# Altium PCB PCB_Simple Signal Generator - 2.0_2021-10-03.pcbdoc
Units mm, origin at the board's own origin, x right, y up, seen from the top; angles counter-clockwise.
Board outline 107.88 x 124.73 mm, 2 copper layers (Top Layer, Bottom Layer); 28 components, 30 nets, 79 pads, 4 vias.
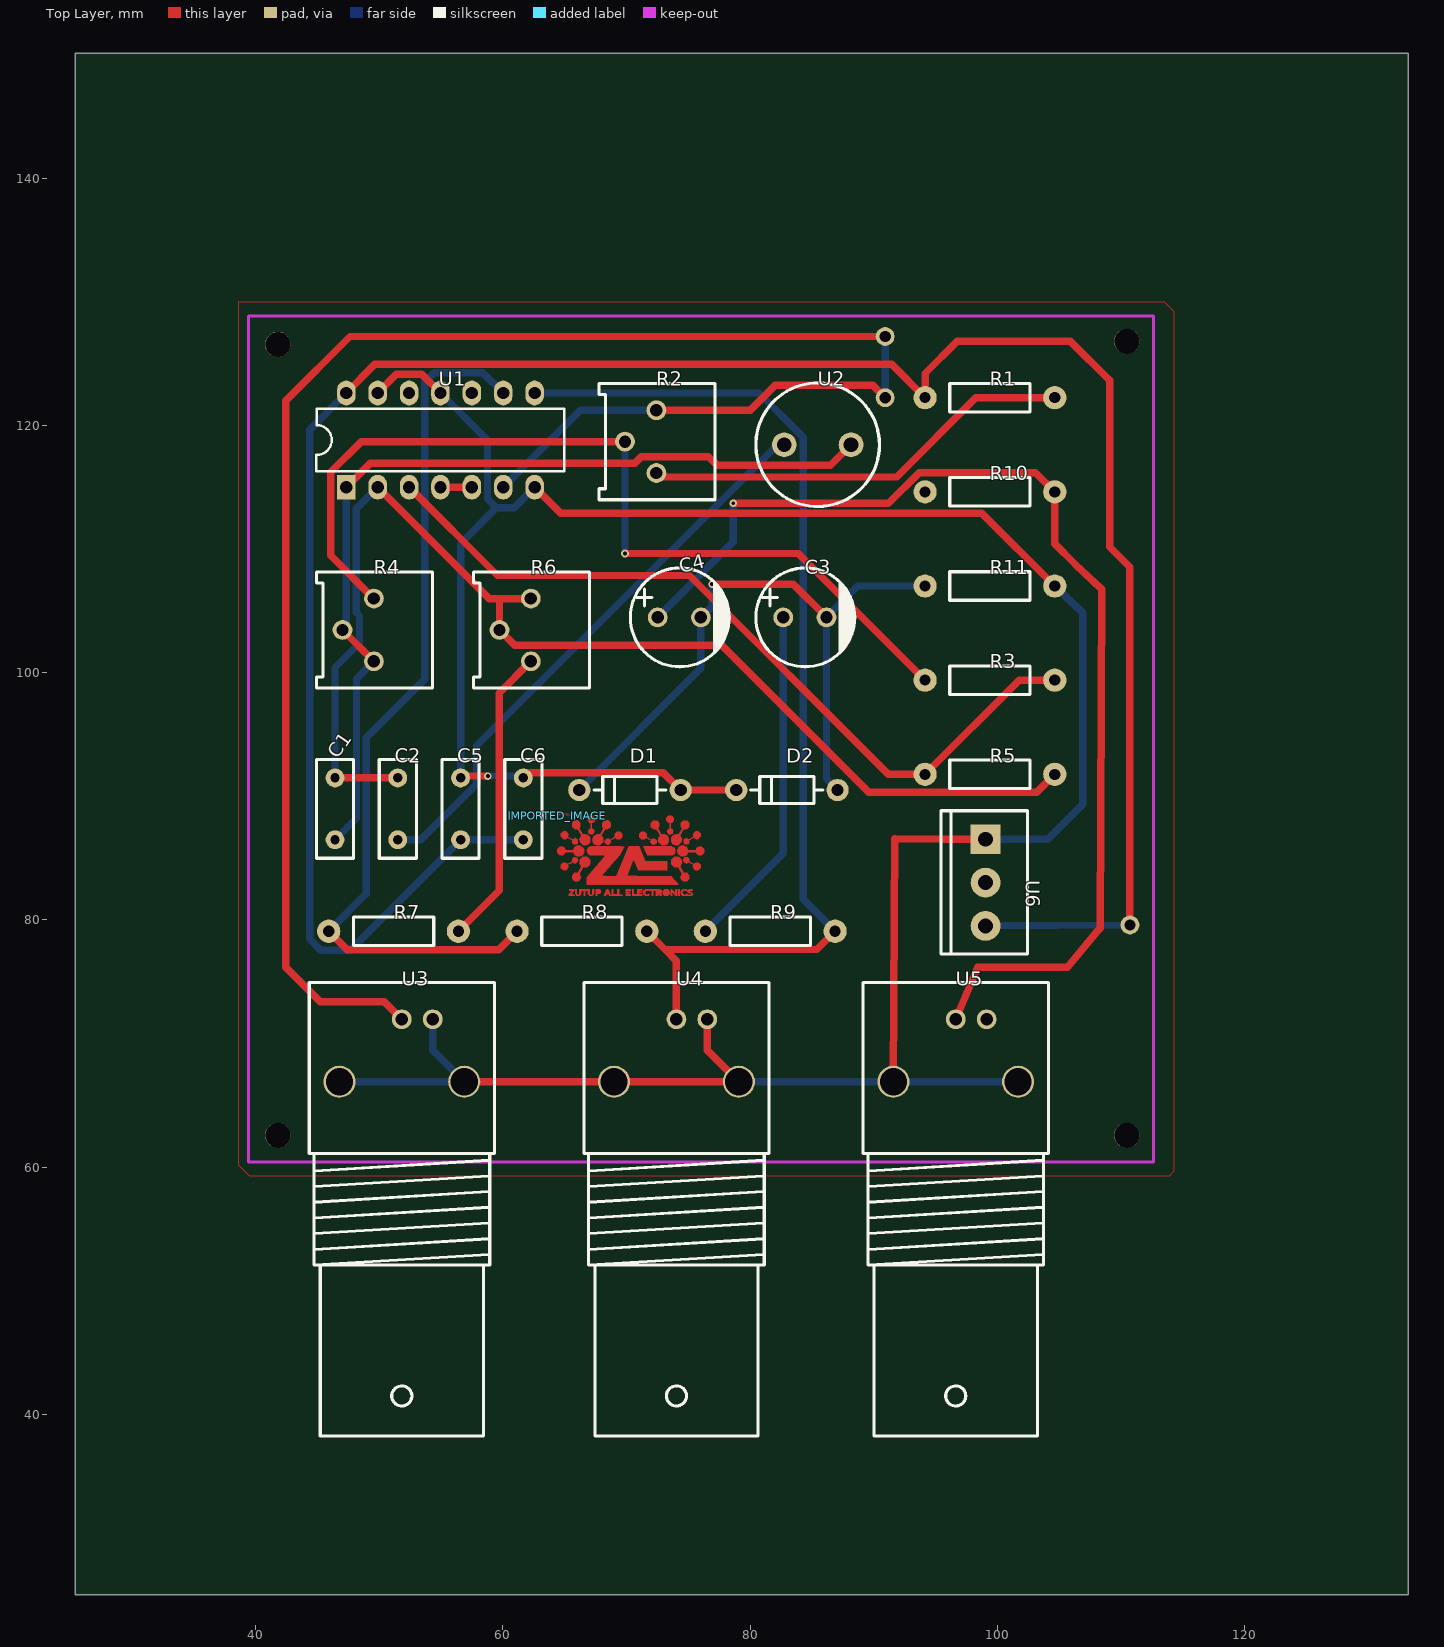
[diagram p0: Top Layer view]
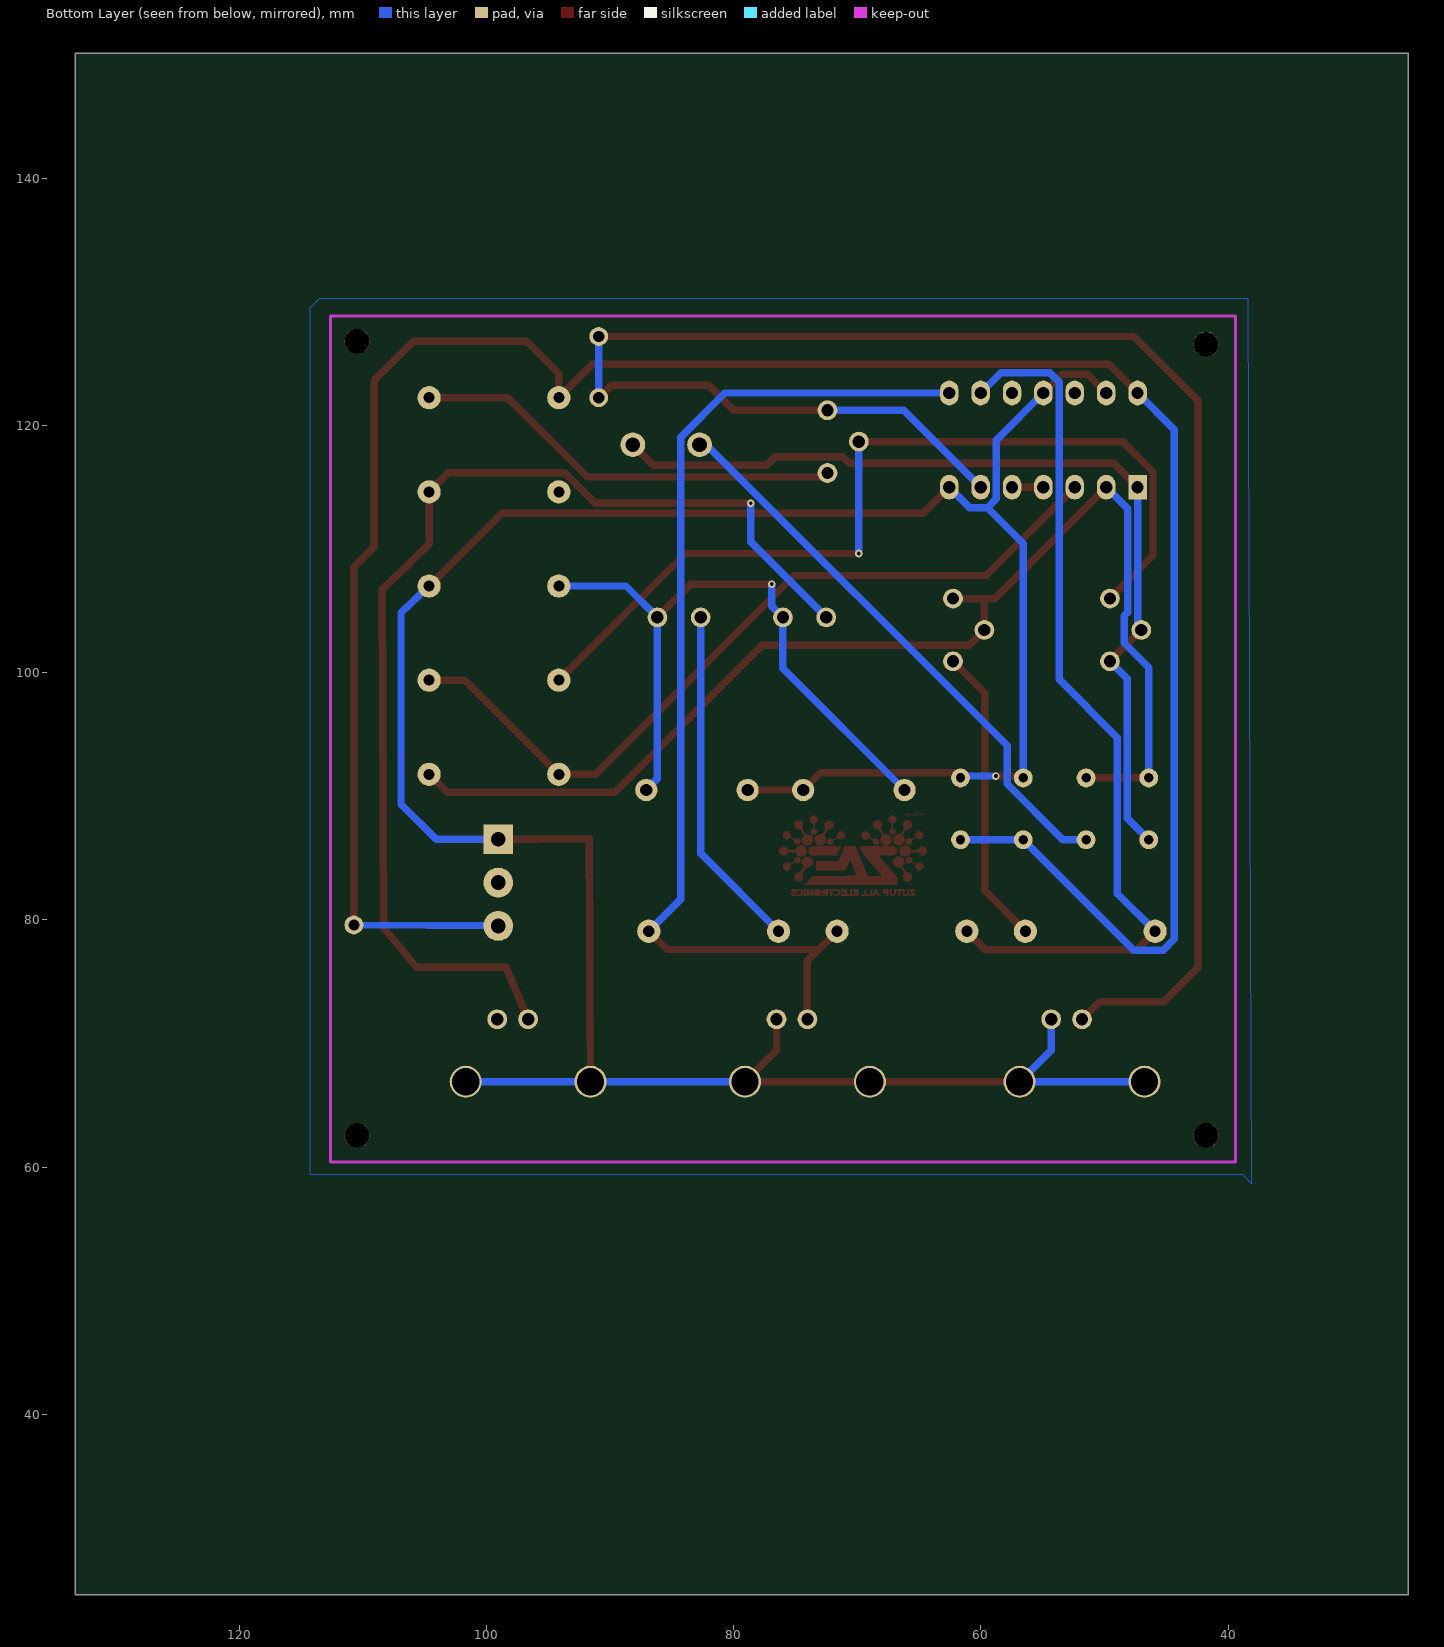
[diagram p1: Bottom Layer view, seen from below]

## Layer stack, top to bottom
Top Layer: signal copper (thickness not stored)
Dielectric: dielectric 0.32, FR-4, Dk 4.8
Bottom Layer: signal copper (thickness not stored)

## Board outline
133.284,25.4 25.4,25.4 25.4,150.129 133.284,150.129

## Components (designator, comment, footprint, x,y, rotation, side; value= is the part's Value field where it differs from the comment)
C1 "1.5nF POLIESTER" "FILM CAPACITOR" 46.412,88.991 r0 top
C2 "22nF POLIESTER" "FILM CAPACITOR" 51.492,88.991 r0 top
C3 "100uF 16V" CAP-TH_BD8.0-P3.50-D0.6-FD 84.433,104.485 r0 top
C4 "100uF 16V" CAP-TH_BD8.0-P3.50-D0.6-FD 74.273,104.485 r0 top
C5 "100nf" "FILM CAPACITOR" 56.572,88.991 r0 top
C6 "100nf 50v ceramico" "FILM CAPACITOR" 61.652,88.991 r0 top
D1 "1N4148" DO-35_BD2.0-L4.2-P8.20-D0.5-R-RD 70.282,90.515 r0 top
D2 "1N4148" DO-35_BD2.0-L4.2-P8.20-D0.5-R-RD 82.982,90.515 r0 top
IMPORTED_IMAGE "IMPORTED_IMAGE" IMPORTED_IMAGE 64.38,88.441 r0 top
R1 "1k" RES-TH_BD2.3-L6.5-P10.50-D0.5 99.412,122.265 r0 top
R2 "10k Duty adj 3386P-503" RES-ADJ-TH_3P-L9.5-W9.5-P2.54-BR-BS 71.149,118.709 r0 top
R3 "27k" RES-TH_BD2.3-L6.5-P10.50-D0.5 99.412,99.405 r0 top
R4 "100k Freq adj 3386P-503" RES-ADJ-TH_3P-L9.5-W9.5-P2.54-BR-BS 48.289,103.469 r0 top
R5 "10k" RES-TH_BD2.3-L6.5-P10.50-D0.5 99.412,91.785 r0 top
R6 "100k Dist adj 3386P-503" RES-ADJ-TH_3P-L9.5-W9.5-P2.54-BR-BS 60.989,103.469 r0 top
R7 "39k" RES-TH_BD2.3-L6.5-P10.50-D0.5 51.152,79.085 r0 top
R8 "100k" RES-TH_BD2.3-L6.5-P10.50-D0.5 66.392,79.085 r0 top
R9 "10k" RES-TH_BD2.3-L6.5-P10.50-D0.5 81.632,79.085 r0 top
R10 "10k" RES-TH_BD2.3-L6.5-P10.50-D0.5 99.412,114.645 r0 top
R11 "10k" RES-TH_BD2.3-L6.5-P10.50-D0.5 99.412,107.025 r0 top
U1 "HEF4069UB" DIP-14_L20.0-W7.6-P2.54-LS7.6-BL 54.944,118.836 r0 top
U2 "Chave" CHAVE 85.471,118.455 r0 top
U3 "ANT-TH_KH-BNC75-3511" ANT-TH_KH-BNC75-3511 51.816,69.433 r0 top
U4 "ANT-TH_KH-BNC75-3511" ANT-TH_KH-BNC75-3511 74.041,69.433 r0 top
U5 "ANT-TH_KH-BNC75-3511" ANT-TH_KH-BNC75-3511 96.647,69.433 r0 top
U6 "SCREWTERMINAL-3.5MM-3" SCREWTERMINAL-3.5MM-3 99.06,83.022 r270 top
? "" ? 116.528,94.643 r0 top
? "" ? 76.136,133.06 r0 top

## Footprints (in the part's own frame and the unit in brackets; to place one, negate y for a bottom-side part, rotate by r counter-clockwise, add the part's x,y. Pads: shape width x height; smd on the part's side, far side on the other; paste and mask are expansions set on the pad)
ANT-TH_KH-BNC75-3511 [mm]
  round 1.6 hole 1: 1(0,2.525) 2(2.5,2.525)
  round 2.601 hole 2.2: 3(5.05,-2.525) 4(-5.05,-2.525)
  silkscreen extent -7.49,-31.21 7.49,5.5
CAP-TH_BD8.0-P3.50-D0.6-FD [mm]
  round 1.6 hole 1: 1(-1.75,0) 2(1.75,0)
  silkscreen extent -3.96,-4 4.04,4
CHAVE [mm]
  round 2 hole 1.2: 1(-2.7,0) 2(2.7,0)
  silkscreen extent -5,-5 5,5
DIP-14_L20.0-W7.6-P2.54-LS7.6-BL [mm]
  rect 1.5x2 hole 1: 1(-7.62,-3.81)
  oval 1.5x2 hole 1: 2(-5.08,-3.81) 3(-2.54,-3.81) 4(0,-3.81) 5(2.54,-3.81) 6(5.08,-3.81) 7(7.62,-3.81) 8(7.62,3.81) 9(5.08,3.81) 10(2.54,3.81) 11(0,3.81) 12(-2.54,3.81) 13(-5.08,3.81) 14(-7.62,3.81)
  silkscreen extent -10.03,-2.53 10,2.54
DO-35_BD2.0-L4.2-P8.20-D0.5-R-RD [mm]
  round 1.8 hole 1: 1(4.1,0) 2(-4.1,0)
  silkscreen extent -2.92,-1.1 2.92,1.1
"FILM CAPACITOR" [mil]
  round 60 hole 30: 1(0,-98.43) 2(0,98.42)
  silkscreen extent -59,-157 59,157
IMPORTED_IMAGE [mm]
  Top Layer region: 1.422,-6.436 1.44,-6.489 0.927,-6.489 0.927,-6.448 0.928,-6.444 0.93,-6.437 0.933,-6.43 0.937,-6.421 0.942,-6.412 0.949,-6.401 0.956,-6.39 0.964,-6.377 0.973,-6.365 0.983,-6.351 0.993,-6.337 1.004,-6.323 1.016,-6.308 1.028,-6.294 1.041,-6.279 1.053,-6.264 1.08,-6.233 1.104,-6.205 1.124,-6.181 1.14,-6.159 1.154,-6.141 1.163,-6.125 1.169,-6.111 1.172,-6.1 1.172,-6.091 1.168,-6.084 1.16,-6.078 1.15,-6.074 1.136,-6.071 1.119,-6.069 1.098,-6.068 1.075,-6.068 0.969,-6.068 0.969,-5.941 1.391,-5.941 1.391,-6.001 1.39,-6.008 1.388,-6.016 1.386,-6.025 1.382,-6.034 1.378,-6.045 1.372,-6.056 1.366,-6.068 1.36,-6.08 1.352,-6.093 1.344,-6.106 1.335,-6.12 1.326,-6.133 1.316,-6.147 1.306,-6.16 1.296,-6.173 1.285,-6.186 1.262,-6.214 1.242,-6.239 1.225,-6.26 1.211,-6.279 1.201,-6.295 1.193,-6.309 1.189,-6.321 1.188,-6.331 1.19,-6.339 1.195,-6.346 1.203,-6.352 1.214,-6.357 1.229,-6.361 1.247,-6.364 1.268,-6.367 1.292,-6.37 1.405,-6.384
  Top Layer region: 3.118,-6.489 3.118,-5.941 3.241,-5.941 3.271,-5.942 3.3,-5.943 3.326,-5.945 3.351,-5.949 3.374,-5.953 3.396,-5.958 3.416,-5.964 3.435,-5.972 3.452,-5.98 3.469,-5.99 3.483,-6 3.497,-6.012 3.51,-6.025 3.522,-6.04 3.532,-6.056 3.542,-6.073 3.585,-6.152 3.498,-6.314 3.245,-6.369 3.245,-6.489 hole: 676183.442,822770.721 676183.442,821897.215 676183.442,821897.215 677648.514,822179.155 677648.514,822179.155 677789.484,822911.691 677789.484,822911.691 677930.708,823644.227 677930.708,823644.227 676183.442,823644.227 676183.442,823644.227 676183.442,822770.721
  Top Layer region: 1.562,-6.489 1.475,-6.326 1.475,-5.941 1.601,-5.941 1.601,-6.31 1.663,-6.361 1.724,-6.412 1.812,-6.358 1.812,-5.941 2.444,-5.941 2.444,-6.068 2.275,-6.068 2.275,-6.489 2.149,-6.489 2.149,-6.068 1.992,-6.068 1.967,-6.219 1.961,-6.251 1.954,-6.282 1.945,-6.314 1.935,-6.343 1.925,-6.371 1.914,-6.395 1.903,-6.415 1.893,-6.43 1.844,-6.489
  Top Layer region: 9.036,-6.423 8.969,-6.489 8.686,-6.489 8.62,-6.423 8.554,-6.357 8.554,-6.095 8.624,-6.018 8.693,-5.941 8.962,-5.941 9.028,-6.015 9.038,-6.027 9.047,-6.038 9.056,-6.05 9.064,-6.063 9.071,-6.076 9.078,-6.089 9.084,-6.102 9.089,-6.115 9.094,-6.128 9.099,-6.142 9.102,-6.156 9.105,-6.17 9.108,-6.184 9.109,-6.197 9.111,-6.211 9.111,-6.225 9.111,-6.239 9.11,-6.253 9.109,-6.267 9.107,-6.28 9.105,-6.293 9.101,-6.307 9.098,-6.32 9.093,-6.332 9.088,-6.345 9.083,-6.357 9.076,-6.369 9.069,-6.381 9.062,-6.392 9.054,-6.403 9.045,-6.413 hole: 731169.108,820856.069 731921.71,820305.905 731921.71,820305.905 732731.462,820739.483 732731.462,820739.483 733541.214,821172.807 733541.214,821172.807 733280.102,823433.661 733280.102,823433.661 732135.832,823565.487 732135.832,823565.487 730991.816,823697.567 730991.816,823697.567 730704.288,822551.773 730704.288,822551.773 730416.76,821406.487 730416.76,821406.487 731169.108,820856.069
  Top Layer region: 5.984,-6.426 5.984,-6.489 5.562,-6.489 5.562,-5.941 5.984,-5.941 5.984,-6.068 5.689,-6.068 5.689,-6.152 5.941,-6.152 5.941,-6.278 5.689,-6.278 5.689,-6.363 5.984,-6.363
  Top Layer region: 7.272,-6.488 7.149,-6.489 6.995,-6.35 6.995,-6.073 7.089,-6.007 7.182,-5.941 7.399,-5.941 7.45,-5.992 7.501,-6.042 7.501,-5.941 7.964,-5.941 7.964,-6.068 7.795,-6.068 7.795,-6.489 7.669,-6.489 7.669,-6.076 7.169,-6.076 7.119,-6.206 7.143,-6.28 7.167,-6.355 7.301,-6.406 7.398,-6.325 7.522,-6.405 7.458,-6.446 7.451,-6.451 7.443,-6.455 7.434,-6.459 7.424,-6.462 7.413,-6.466 7.402,-6.47 7.39,-6.473 7.378,-6.476 7.365,-6.479 7.352,-6.481 7.338,-6.483 7.325,-6.485 7.311,-6.486 7.298,-6.487 7.285,-6.488
  Top Layer region: 2.617,-6.489 2.552,-6.395 2.486,-6.302 2.486,-5.941 2.655,-5.941 2.655,-6.358 2.743,-6.412 2.865,-6.31 2.865,-5.941 2.992,-5.941 2.992,-6.326 2.948,-6.408 2.905,-6.489
  Top Layer region: 6.911,-6.426 6.911,-6.489 6.489,-6.489 6.489,-5.941 6.911,-5.941 6.911,-6.068 6.658,-6.068 6.658,-6.152 6.918,-6.152 6.883,-6.257 6.658,-6.284 6.658,-6.363 6.911,-6.363
  Top Layer region: 9.571,-6.489 9.442,-6.332 9.312,-6.175 9.312,-6.489 9.186,-6.489 9.186,-5.941 9.291,-5.941 9.562,-6.257 9.564,-6.099 9.565,-5.941 9.692,-5.941 9.692,-6.489
  Top Layer region: 6.447,-6.426 6.447,-6.489 6.068,-6.489 6.068,-5.941 6.194,-5.941 6.194,-6.363 6.447,-6.363
  Top Layer region: 9.945,-6.215 9.945,-6.489 9.776,-6.489 9.776,-5.941 9.945,-5.941
  Top Layer region: 4.375,-6.456 4.389,-6.489 4.214,-6.489 4.214,-6.363 3.97,-6.363 3.921,-6.489 3.783,-6.489 3.808,-6.43 3.833,-6.369 3.883,-6.253 3.921,-6.163 4.014,-5.941 4.156,-5.941 4.28,-6.232 4.35,-6.397 hole: 684189.522,822169.503 684189.522,821537.551 684189.522,821537.551 685032.294,821537.551 685032.294,821537.551 685032.294,822801.455 685032.294,822801.455 684189.522,822801.455 684189.522,822801.455 684189.522,822169.503
  Top Layer region: 8.175,-6.426 8.175,-6.489 8.006,-6.489 8.006,-5.941 8.307,-5.941 8.47,-6.029 8.47,-6.273 8.378,-6.33 8.424,-6.376 8.442,-6.396 8.456,-6.418 8.466,-6.439 8.47,-6.455 8.468,-6.465 8.465,-6.473 8.459,-6.48 8.451,-6.484 8.442,-6.487 8.431,-6.489 8.419,-6.489 8.406,-6.487 8.393,-6.484 8.379,-6.48 8.365,-6.474 8.351,-6.467 8.337,-6.458 8.324,-6.449 8.312,-6.438 8.301,-6.426 8.278,-6.401 8.253,-6.381 8.23,-6.368 8.212,-6.363 8.175,-6.363 hole: 725484.588,822801.455 725484.588,821897.215 725484.588,821897.215 726959.312,822181.187 726959.312,822181.187 726959.312,823422.231 726959.312,823422.231 725484.588,823706.203 725484.588,823706.203 725484.588,822801.455
  Top Layer region: 4.424,-6.489 4.424,-5.941 4.551,-5.941 4.551,-6.363 4.846,-6.363 4.846,-6.489
  Top Layer region: 4.888,-6.489 4.888,-5.941 5.014,-5.941 5.014,-6.357 5.282,-6.384 5.316,-6.489
  Top Layer region: 10.909,-6.482 10.531,-6.481 10.152,-6.48 10.029,-6.357 10.029,-6.095 10.099,-6.018 10.168,-5.941 10.44,-5.941 10.487,-5.998 10.534,-6.054 10.482,-6.106 10.357,-6.081 10.231,-6.055 10.194,-6.114 10.186,-6.128 10.179,-6.143 10.173,-6.159 10.167,-6.177 10.163,-6.195 10.159,-6.213 10.157,-6.23 10.156,-6.245 10.155,-6.318 10.329,-6.411 10.437,-6.321 10.466,-6.35 10.47,-6.353 10.475,-6.356 10.482,-6.36 10.491,-6.362 10.5,-6.365 10.511,-6.368 10.523,-6.371 10.536,-6.374 10.55,-6.376 10.564,-6.378 10.579,-6.381 10.595,-6.383 10.611,-6.384 10.628,-6.386 10.645,-6.387 10.662,-6.388 10.829,-6.397 10.872,-6.327 10.584,-6.232 10.561,-6.171 10.537,-6.11 10.561,-6.046 10.586,-5.983 10.683,-5.958 10.704,-5.954 10.727,-5.95 10.75,-5.947 10.774,-5.945 10.796,-5.944 10.818,-5.945 10.837,-5.946 10.854,-5.948 10.928,-5.962 10.945,-6.015 10.963,-6.068 10.703,-6.068 10.703,-6.101 10.704,-6.104 10.706,-6.108 10.709,-6.113 10.713,-6.117 10.718,-6.122 10.725,-6.127 10.732,-6.132 10.74,-6.138 10.749,-6.143 10.759,-6.149 10.769,-6.155 10.78,-6.16 10.792,-6.166 10.804,-6.171 10.816,-6.176 10.829,-6.181 10.956,-6.229 11.007,-6.364
  Top Layer region: 183 vertices and 0 holes, not listed, extent 2.398,-5.604 9.818,-2.486
  Top Layer region: 1.72,-5.292 1.597,-5.356 1.504,-5.328 1.494,-5.324 1.484,-5.32 1.473,-5.315 1.461,-5.31 1.449,-5.304 1.436,-5.297 1.424,-5.29 1.411,-5.282 1.398,-5.274 1.386,-5.266 1.373,-5.257 1.361,-5.249 1.349,-5.24 1.338,-5.231 1.327,-5.222 1.317,-5.213 1.222,-5.126 1.222,-4.857 1.309,-4.746 1.397,-4.635 1.681,-4.635 1.971,-4.119 1.887,-3.976 1.803,-3.833 1.829,-3.691 1.856,-3.549 1.966,-3.439 2.076,-3.329 2.45,-3.329 2.574,-3.452 2.697,-3.575 2.697,-3.917 2.455,-4.188 2.278,-4.192 2.1,-4.197 1.964,-4.452 1.828,-4.707 1.889,-4.837 1.951,-4.966 1.897,-5.098 1.842,-5.229
  Top Layer region: 10.323,-5.353 10.203,-5.291 10.083,-5.229 10.028,-5.098 9.974,-4.966 10.036,-4.835 10.098,-4.704 9.956,-4.447 9.813,-4.191 9.472,-4.191 9.35,-4.054 9.228,-3.917 9.228,-3.575 9.351,-3.452 9.475,-3.329 9.849,-3.329 9.957,-3.437 10.066,-3.546 10.093,-3.67 10.12,-3.795 10.039,-3.96 9.957,-4.125 10.244,-4.635 10.528,-4.635 10.616,-4.746 10.703,-4.857 10.703,-5.087 10.619,-5.193 10.536,-5.3
  Top Layer region: 0.517,-4.424 0.295,-4.25 0.295,-3.987 0.387,-3.89 0.478,-3.792 0.698,-3.792 0.784,-3.853 0.87,-3.913 1.046,-3.808 1.222,-3.703 1.222,-3.503 1.29,-3.435 1.359,-3.366 1.49,-3.379 1.622,-3.392 1.678,-3.51 1.734,-3.628 1.603,-3.828 1.52,-3.855 1.436,-3.881 1.256,-3.785 1.071,-3.883 0.886,-3.981 0.909,-4.053 0.931,-4.125 0.868,-4.249 0.804,-4.372 0.736,-4.398 0.72,-4.403 0.703,-4.408 0.685,-4.413 0.665,-4.417 0.646,-4.42 0.627,-4.422 0.609,-4.424 0.592,-4.424
  Top Layer region: 11.519,-4.337 11.408,-4.424 11.333,-4.424 11.316,-4.424 11.298,-4.422 11.279,-4.42 11.26,-4.417 11.24,-4.413 11.222,-4.408 11.205,-4.403 11.189,-4.398 11.121,-4.372 11.057,-4.249 10.994,-4.125 11.016,-4.053 11.039,-3.981 10.854,-3.883 10.669,-3.785 10.489,-3.881 10.405,-3.855 10.322,-3.828 10.258,-3.732 10.195,-3.636 10.224,-3.556 10.231,-3.539 10.238,-3.521 10.247,-3.502 10.256,-3.484 10.266,-3.467 10.275,-3.45 10.285,-3.436 10.293,-3.424 10.334,-3.371 10.571,-3.371 10.703,-3.503 10.703,-3.703 10.879,-3.808 11.055,-3.913 11.141,-3.853 11.227,-3.792 11.435,-3.792 11.533,-3.884 11.63,-3.976 11.63,-4.25
  Top Layer region: 1.596,-3.287 1.434,-3.2 1.304,-2.95 0.711,-2.95 0.498,-3.202 0.207,-3.202 0,-2.996 0,-2.704 0.268,-2.479 0.521,-2.529 0.598,-2.598 0.613,-2.614 0.627,-2.63 0.64,-2.647 0.652,-2.664 0.661,-2.681 0.668,-2.697 0.673,-2.712 0.674,-2.724 0.674,-2.781 1.304,-2.781 1.438,-2.522 1.588,-2.457 1.616,-2.445 1.629,-2.439 1.641,-2.434 1.652,-2.43 1.663,-2.426 1.673,-2.422 1.683,-2.419 1.692,-2.416 1.701,-2.414 1.71,-2.412 1.718,-2.41 1.727,-2.409 1.735,-2.408 1.743,-2.408 1.751,-2.408 1.759,-2.409 1.767,-2.41 1.776,-2.411 1.784,-2.413 1.793,-2.415 1.803,-2.418 1.812,-2.421 1.823,-2.424 1.833,-2.428 1.845,-2.433 1.857,-2.437 1.883,-2.448 1.913,-2.461 2.054,-2.519 2.191,-2.716 2.191,-2.954 2.128,-3.077 2.064,-3.2 1.902,-3.287
  Top Layer region: 9.991,-3.287 9.771,-3.097 9.747,-2.919 9.723,-2.741 9.795,-2.631 9.867,-2.521 10.016,-2.457 10.044,-2.445 10.057,-2.439 10.069,-2.434 10.08,-2.43 10.091,-2.426 10.101,-2.422 10.111,-2.419 10.12,-2.416 10.129,-2.414 10.138,-2.412 10.146,-2.41 10.154,-2.409 10.163,-2.408 10.171,-2.408 10.179,-2.408 10.187,-2.409 10.195,-2.41 10.204,-2.411 10.213,-2.413 10.222,-2.415 10.231,-2.418 10.241,-2.421 10.251,-2.425 10.262,-2.429 10.274,-2.433 10.286,-2.438 10.313,-2.449 10.343,-2.462 10.487,-2.522 10.554,-2.651 10.621,-2.781 11.251,-2.781 11.251,-2.724 11.252,-2.712 11.257,-2.697 11.264,-2.681 11.273,-2.664 11.285,-2.647 11.298,-2.63 11.312,-2.614 11.327,-2.598 11.404,-2.529 11.657,-2.479 11.925,-2.704 11.925,-2.996 11.718,-3.202 11.435,-3.202 11.343,-3.117 11.307,-3.08 11.278,-3.044 11.258,-3.013 11.251,-2.99 11.251,-2.95 10.621,-2.95 10.491,-3.2 10.329,-3.287
  Top Layer region: 9.474,-3.105 9.382,-3.202 7.292,-3.202 7.144,-2.88 7.114,-2.815 7.086,-2.753 7.061,-2.695 7.039,-2.642 7.02,-2.598 7.007,-2.562 6.998,-2.536 6.995,-2.522 6.995,-2.486 9.275,-2.486 9.394,-2.548 9.513,-2.609 9.539,-2.678 9.542,-2.685 9.544,-2.694 9.547,-2.704 9.549,-2.714 9.552,-2.726 9.554,-2.738 9.556,-2.751 9.558,-2.764 9.559,-2.778 9.561,-2.792 9.562,-2.806 9.563,-2.82 9.564,-2.835 9.565,-2.849 9.565,-2.863 9.565,-2.877 9.565,-3.007
  Top Layer region: 2.457,-2.355 2.365,-2.402 2.1,-2.402 1.979,-2.281 1.858,-2.16 1.828,-2.04 1.798,-1.921 1.884,-1.765 1.97,-1.608 1.818,-1.352 1.667,-1.096 1.429,-1.096 1.222,-0.889 1.222,-0.758 1.223,-0.73 1.226,-0.7 1.23,-0.67 1.235,-0.64 1.242,-0.612 1.249,-0.586 1.258,-0.562 1.267,-0.543 1.312,-0.459 1.404,-0.422 1.424,-0.414 1.447,-0.407 1.472,-0.401 1.497,-0.395 1.523,-0.39 1.548,-0.386 1.571,-0.383 1.593,-0.382 1.689,-0.379 1.896,-0.586 1.896,-0.91 1.8,-1.007 2.09,-1.496 2.193,-1.508 2.216,-1.51 2.241,-1.514 2.268,-1.518 2.295,-1.522 2.322,-1.527 2.349,-1.532 2.373,-1.536 2.395,-1.541 2.493,-1.562 2.595,-1.672 2.697,-1.782 2.695,-2.128 2.622,-2.218 2.606,-2.237 2.587,-2.256 2.566,-2.276 2.544,-2.295 2.521,-2.313 2.499,-2.329 2.477,-2.343
  Top Layer region: 8.471,-2.402 8.333,-2.279 8.196,-2.156 8.196,-1.779 8.268,-1.699 8.339,-1.62 8.185,-1.358 8.03,-1.096 7.807,-1.096 7.696,-1.008 7.585,-0.921 7.585,-0.586 7.693,-0.478 7.802,-0.369 8.112,-0.419 8.185,-0.509 8.259,-0.599 8.259,-0.91 8.165,-1.004 8.306,-1.261 8.447,-1.517 8.719,-1.517 8.94,-1.618 9,-1.734 9.06,-1.85 9.06,-2.069 9,-2.185 8.94,-2.301 8.829,-2.351 8.817,-2.357 8.804,-2.362 8.791,-2.366 8.776,-2.371 8.762,-2.375 8.746,-2.38 8.731,-2.383 8.715,-2.387 8.699,-2.39 8.683,-2.393 8.667,-2.396 8.652,-2.398 8.636,-2.4 8.622,-2.401 8.608,-2.402 8.595,-2.402
  Top Layer region: 3.592,-2.279 3.454,-2.402 3.33,-2.402 3.317,-2.402 3.303,-2.401 3.289,-2.4 3.273,-2.398 3.258,-2.396 3.242,-2.393 3.226,-2.39 3.21,-2.387 3.194,-2.383 3.179,-2.38 3.163,-2.375 3.149,-2.371 3.134,-2.366 3.121,-2.362 3.108,-2.357 3.096,-2.351 2.985,-2.301 2.925,-2.185 2.919,-2.172 2.912,-2.158 2.907,-2.145 2.901,-2.132 2.896,-2.118 2.892,-2.105 2.887,-2.091 2.884,-2.078 2.88,-2.064 2.877,-2.05 2.875,-2.037 2.873,-2.023 2.871,-2.009 2.869,-1.996 2.869,-1.982 2.868,-1.968 2.868,-1.954 2.868,-1.941 2.869,-1.927 2.87,-1.913 2.872,-1.899 2.874,-1.885 2.876,-1.872 2.879,-1.858 2.882,-1.844 2.885,-1.83 2.89,-1.816 2.894,-1.803 2.899,-1.789 2.904,-1.775 2.91,-1.761 2.916,-1.747 2.966,-1.637 3.082,-1.577 3.198,-1.517 3.337,-1.516 3.476,-1.516 3.617,-1.259 3.758,-1.003 3.666,-0.91 3.666,-0.627 3.756,-0.459 3.848,-0.422 3.868,-0.414 3.891,-0.407 3.916,-0.401 3.941,-0.395 3.967,-0.39 3.992,-0.386 4.015,-0.383 4.037,-0.382 4.133,-0.379 4.34,-0.586 4.34,-0.921 4.229,-1.008 4.118,-1.096 3.895,-1.096 3.74,-1.358 3.586,-1.62 3.657,-1.699 3.729,-1.779 3.729,-2.156
  Top Layer region: 9.56,-2.402 9.468,-2.355 9.448,-2.343 9.426,-2.329 9.404,-2.313 9.381,-2.295 9.359,-2.276 9.338,-2.256 9.319,-2.237 9.303,-2.218 9.23,-2.128 9.228,-1.782 9.33,-1.672 9.432,-1.562 9.53,-1.541 9.552,-1.536 9.576,-1.532 9.603,-1.527 9.63,-1.522 9.657,-1.518 9.684,-1.514 9.709,-1.51 9.732,-1.508 9.835,-1.496 10.125,-1.007 10.029,-0.91 10.029,-0.586 10.246,-0.369 10.556,-0.419 10.629,-0.509 10.703,-0.599 10.703,-0.889 10.496,-1.096 10.258,-1.096 10.107,-1.352 9.955,-1.608 10.041,-1.765 10.127,-1.921 10.097,-2.04 10.067,-2.16 9.946,-2.281 9.825,-2.402
  Top Layer region: 7.945,-2.299 7.842,-2.367 7.754,-2.339 7.667,-2.311 7.6,-2.209 7.533,-2.108 7.576,-1.997 7.391,-1.899 7.207,-1.801 7.085,-1.902 6.956,-1.905 6.826,-1.909 6.658,-1.757 6.658,-1.46 6.727,-1.383 6.797,-1.306 7.079,-1.306 7.248,-1.475 7.248,-1.723 7.604,-1.936 7.686,-1.854 7.916,-1.854 8.048,-1.986 8.048,-2.231
  Top Layer region: 4.119,-2.355 4.111,-2.355 4.102,-2.354 4.093,-2.353 4.084,-2.352 4.075,-2.35 4.066,-2.347 4.056,-2.343 4.046,-2.339 4.036,-2.334 4.026,-2.329 4.016,-2.323 4.005,-2.317 3.994,-2.31 3.982,-2.302 3.97,-2.294 3.877,-2.228 3.877,-1.986 4.009,-1.854 4.239,-1.854 4.319,-1.932 4.498,-1.826 4.677,-1.719 4.677,-1.475 4.762,-1.391 4.846,-1.306 5.113,-1.306 5.267,-1.446 5.267,-1.757 5.099,-1.909 4.969,-1.905 4.84,-1.902 4.718,-1.801 4.53,-1.901 4.341,-2.001 4.388,-2.148 4.282,-2.254 4.27,-2.265 4.259,-2.275 4.248,-2.285 4.238,-2.294 4.228,-2.303 4.218,-2.311 4.209,-2.318 4.199,-2.325 4.19,-2.331 4.181,-2.336 4.172,-2.34 4.163,-2.344 4.154,-2.348 4.145,-2.35 4.137,-2.352 4.128,-2.354
  Top Layer region: 1.317,-2.318 1.211,-2.191 1.211,-1.995 0.858,-1.781 0.7,-1.896 0.517,-1.896 0.406,-1.809 0.295,-1.721 0.295,-1.439 0.406,-1.351 0.517,-1.264 0.592,-1.264 0.609,-1.265 0.627,-1.266 0.646,-1.269 0.665,-1.272 0.685,-1.276 0.703,-1.28 0.72,-1.285 0.736,-1.29 0.804,-1.316 0.868,-1.44 0.931,-1.563 0.908,-1.635 0.886,-1.708 1.243,-1.922 1.354,-1.859 1.465,-1.796 1.575,-1.868 1.686,-1.94 1.686,-2.216 1.584,-2.318
  Top Layer region: 10.341,-2.318 10.239,-2.216 10.239,-1.94 10.35,-1.868 10.46,-1.796 10.571,-1.859 10.682,-1.922 11.039,-1.708 11.017,-1.635 10.994,-1.563 11.058,-1.439 11.072,-1.413 11.087,-1.388 11.103,-1.365 11.119,-1.344 11.135,-1.326 11.15,-1.311 11.164,-1.299 11.176,-1.292 11.189,-1.288 11.204,-1.284 11.221,-1.28 11.24,-1.276 11.26,-1.273 11.28,-1.27 11.3,-1.269 11.319,-1.267 11.408,-1.264 11.519,-1.351 11.63,-1.439 11.63,-1.721 11.519,-1.809 11.408,-1.896 11.225,-1.896 11.07,-1.783 10.892,-1.882 10.714,-1.982 10.714,-2.191 10.608,-2.318
  Top Layer region: 2.792,-1.561 2.683,-1.52 2.573,-1.478 2.521,-1.27 2.548,-1.185 2.575,-1.1 2.739,-1.048 2.739,-0.59 2.682,-0.59 2.669,-0.588 2.654,-0.583 2.637,-0.575 2.62,-0.565 2.601,-0.552 2.583,-0.538 2.565,-0.522 2.549,-0.505 2.472,-0.42 2.472,-0.17 2.626,0 2.908,0 3.076,-0.169 3.076,-0.403 3.01,-0.496 2.945,-0.59 2.823,-0.59 2.823,-1.053 2.864,-1.053 2.874,-1.056 2.886,-1.062 2.899,-1.071 2.913,-1.084 2.928,-1.099 2.944,-1.117 2.959,-1.136 2.973,-1.157 3.041,-1.26 2.985,-1.435 2.889,-1.498
  Top Layer region: 9.133,-1.561 9.036,-1.498 8.94,-1.435 8.884,-1.26 8.952,-1.157 8.981,-1.117 9.012,-1.084 9.039,-1.062 9.061,-1.053 9.102,-1.053 9.102,-0.59 8.98,-0.59 8.915,-0.496 8.849,-0.403 8.849,-0.169 9.017,0 9.299,0 9.453,-0.17 9.453,-0.42 9.376,-0.505 9.36,-0.522 9.342,-0.538 9.324,-0.552 9.305,-0.565 9.288,-0.575 9.271,-0.583 9.256,-0.588 9.243,-0.59 9.186,-0.59 9.186,-1.048 9.27,-1.074 9.354,-1.101 9.379,-1.201 9.404,-1.3 9.376,-1.39 9.347,-1.48 9.24,-1.52
RES-ADJ-TH_3P-L9.5-W9.5-P2.54-BR-BS [mm]
  round 1.6 hole 1: 1(1.27,-2.54) 2(-1.27,0) 3(1.27,2.54)
  silkscreen extent -3.38,-4.7 6.02,4.7
RES-TH_BD2.3-L6.5-P10.50-D0.5 [mil]
  round 74 hole 35.4: 1(-206.69,0) 2(206.69,0)
  silkscreen extent -128,-45 128,45
SCREWTERMINAL-3.5MM-3 [mil]
  rect 95x95 hole 47.2: 1(-138,0)
  round 95 hole 47.2: 2(0,0) 3(138,0)
  silkscreen extent -229,-142 228,134
? [mm]

## Free pads (board coordinates)
  round 1.524 hole 0.914: 2(90.932,122.265) 3(90.932,127.218) 5(110.744,79.593)
  round 2.032 hole 2.032 unplated: ""(41.783,62.575) ""(41.783,126.583) ""(110.49,62.575) ""(110.49,126.837)

## Via types
v1: diameter 0.61, hole 0.305, Top Layer to Bottom Layer, 4 vias

## Nets (pads, with @x,y where several pads share a name; then routed paths per layer and width w, separated by ;. In a path a pad name is that pad's centre, name@x,y a point inside that pad or via, vN(x,y) a via of type N, cw(c..) or ccw(c..) an arc to the next point about the centre after c; other vN are vias at no path point)
+5V: C5.1 C6.1 pad.5 R1.1 U1.14 | length 179.7
  Top Layer w0.6: U1.14@47.324,122.646 49.638,124.96 91.467,124.96 94.162,122.265 94.162,124.225 96.774,126.837 105.918,126.837 109.093,123.662 109.093,110.2 110.744,108.549 pad.5
  Bottom Layer w0.6: U1.14@47.324,122.646 44.356,119.678 44.356,78.455 45.256,77.554 47.635,77.554 C5.1 C6.1
C2_1: C2.1 U2.1 | length 46.3
  Bottom Layer w0.6: C2.1 53.363,86.491 57.877,91.005 57.877,94.116 82.217,118.455 U2.1
C3_2: C3.2 C4.2 D1.2 D2.1 R11.1 | length 54.9
  Top Layer w0.6: v1(76.931,107.18) 83.488,107.18 C3.2
  Bottom Layer w0.6: D1.2 76.023,100.356 C4.2 76.931,105.393 v1(76.931,107.18) ; D2.1 86.183,91.414 C3.2 88.723,107.025 R11.1@94.162,107.025
C4_1: C4.1 R10.2 | length 92.4
  Top Layer w0.6: v1(78.633,113.731) 91.204,113.731 93.677,116.204 103.102,116.204 R10.2 ; 96.647,71.958 98.425,76.164 105.664,76.164 108.331,79.339 108.458,106.771 106.299,108.803 104.648,110.454 104.661,111.33 R10.2
  Bottom Layer w0.6: C4.1 78.633,110.596 v1(78.633,113.731)
GND: C5.2 C6.2 D1.1 D2.2 R11.2 U1.7 U1.11 U1.13 | length 113
  Top Layer w0.6: U1.13@49.864,122.646 51.375,124.157 53.433,124.157 U1.11@54.944,122.646 ; C5.2 56.727,91.646 v1(58.788,91.646) ; C6.2 62.078,91.917 72.98,91.917 D1.1 D2.2 ; U1.7@62.564,115.026 64.667,112.924 98.763,112.924 R11.2
  Bottom Layer w0.6: U1.11@54.944,122.646 58.754,118.836 58.754,114.083 59.471,113.367 ; C5.2 56.572,110.468 59.471,113.367 ; v1(58.788,91.646) 61.497,91.646 C6.2 ; U1.7@62.564,115.026 60.904,113.367 59.471,113.367
R1_2: R1.2 R2.1 | length 35
  Top Layer w0.6: R2.1@72.419,116.169 72.74,115.849 91.863,115.849 98.279,122.265 R1.2
R2_2: R2.2 R3.1 R4.3 | length 74.1
  Top Layer w0.6: R4.3@49.559,106.009 46.072,109.497 46.072,116.249 48.532,118.709 R2.2@69.879,118.709 ; v1(69.879,109.655) 83.912,109.655 R3.1@94.162,99.405
  Bottom Layer w0.6: v1(69.879,109.655) R2.2@69.879,118.709
R6_1: R6.1 R7.2 | length 24.3
  Top Layer w0.6: R7.2 59.699,82.383 59.699,98.369 R6.1@62.259,100.929
R9_1: C3.1 R9.1 | length 28
  Bottom Layer w0.6: R9.1@76.382,79.085 82.683,85.386 C3.1
RAMP: R8.2 R9.2 U1.8 | length 86.8
  Top Layer w0.6: R8.2 73.116,77.61 ; 74.041,71.958 74.041,76.686 73.116,77.61 ; R9.2 85.407,77.61 73.116,77.61
  Bottom Layer w0.6: U1.8@62.564,122.646 80.724,122.646 84.303,119.068 84.303,81.664 R9.2
S$1175: U3.2 U3.3 | length 18.2
  Top Layer w0.6: U3.3 68.991,66.908
  Bottom Layer w0.6: U3.2 54.316,69.458 U3.3
S$1177: U3.4 | length 10.1
  Bottom Layer w0.6: U3.4 56.866,66.908
S$1180: U4.4
S$1184: U4.3 U5.4 | length 22.6
  Bottom Layer w0.6: U4.3 U5.4 101.697,66.908
S$1188: U4.2 | length 6.1
  Top Layer w0.6: U4.2 76.541,69.458 79.091,66.908
S$1190: U5.3
S$1192: U5.2
S$1364:  | length 10.1
  Top Layer w0.6: 68.991,66.908 79.091,66.908
S$1393: pad.2 pad.3 | length 112.6
  Top Layer w0.6: 51.816,71.958 50.404,73.37 45.212,73.37 42.418,76.164 42.418,122.011 47.625,127.218 pad.3
  Bottom Layer w0.6: pad.2 pad.3
S$5590: U6.1 | length 54.7
  Top Layer w0.6: 91.597,66.908 91.694,86.578 95.707,86.527 U6.1
  Bottom Layer w0.6: U6.1 104.089,86.527 106.934,89.372 106.934,104.866 104.661,107.025
S$5612: U6.3 | length 11.7
  Bottom Layer w0.6: U6.3 110.744,79.593
SINE: R10.1
SQUARE: R2.3 U1.6 | length 34.7
  Top Layer w0.6: R2.3 80.01,121.249 82.042,123.281 89.916,123.281 90.932,122.265
  Bottom Layer w0.6: U1.6@60.024,115.026 66.247,121.249 R2.3@72.419,121.249
U1_1: C1.1 R4.1 R4.2 U1.1 U2.2 | length 73.9
  Top Layer w0.6: R4.2@47.019,103.469 R4.1@49.559,100.929 ; U1.1@47.324,115.026 49.252,116.954 70.664,116.954 71.202,117.492 76.635,117.492 77.337,116.79 86.506,116.79 U2.2
  Bottom Layer w0.6: C1.1 48.149,88.228 48.149,99.519 R4.1@49.559,100.929 ; R4.2@47.019,103.469 47.324,103.774 U1.1@47.324,115.026
U1_2: C1.2 C2.2 R5.2 R6.2 R6.3 U1.2 | length 99.9
  Top Layer w0.6: C1.2 C2.2 ; U1.2@49.864,115.026 58.881,106.009 59.719,106.009 ; R6.3@62.259,106.009 59.719,106.009 ; R5.2 103.196,90.32 89.614,90.32 77.702,102.232 60.957,102.232 59.719,103.469 59.719,106.009
  Bottom Layer w0.6: C1.2 46.412,100.43 48.393,102.411 48.393,104.635 48.127,104.901 48.127,113.289 U1.2@49.864,115.026
U1_3: R3.2 R5.1 U1.3 | length 65
  Top Layer w0.6: U1.3@52.404,115.026 59.557,107.873 75.097,107.873 91.184,91.785 94.162,91.785 101.782,99.405 R3.2
U1_4: U1.4 U1.5 | length 2.5
  Top Layer w0.6: U1.4@54.944,115.026 U1.5@57.484,115.026
U1_9: R7.1 R8.1 U1.9 | length 71.5
  Top Layer w0.6: R7.1@45.902,79.085 47.395,77.592 59.649,77.592 R8.1@61.142,79.085
  Bottom Layer w0.6: R7.1@45.902,79.085 48.952,82.136 48.952,94.75 53.674,99.472 53.674,123.527 54.44,124.293 58.377,124.293 U1.9@60.024,122.646
U1_10: U1.10
U1_12: U1.12
pads on no net: U3.1 U4.1 U5.1 U6.2

## Polygon pours and split planes (outlines as drawn)
GND on Bottom Layer (solid): 38.354,130.266 113.538,130.266 114.3,129.504 114.3,59.4 38.862,59.4 38.1,58.638
GND on Top Layer (solid): 38.608,130.012 113.538,130.012 114.3,129.25 114.3,59.654 113.919,59.273 39.497,59.273 38.608,60.162

## Text inside footprints (layer, text, board x,y; h text height)
R2: Document "1" at 73.181,116.169 h0.51 r90; Document "2" at 69.498,120.614 h0.51 r90; Document "3" at 73.181,121.503 h0.51 r90
R4: Document "1" at 50.321,100.929 h0.51 r90; Document "2" at 46.638,105.374 h0.51 r90; Document "3" at 50.321,106.263 h0.51 r90
R6: Document "1" at 63.021,100.929 h0.51 r90; Document "2" at 59.338,105.374 h0.51 r90; Document "3" at 63.021,106.263 h0.51 r90